# EAGLE board BMS Microcontroller rev1 (EAGLE 7.7.0)
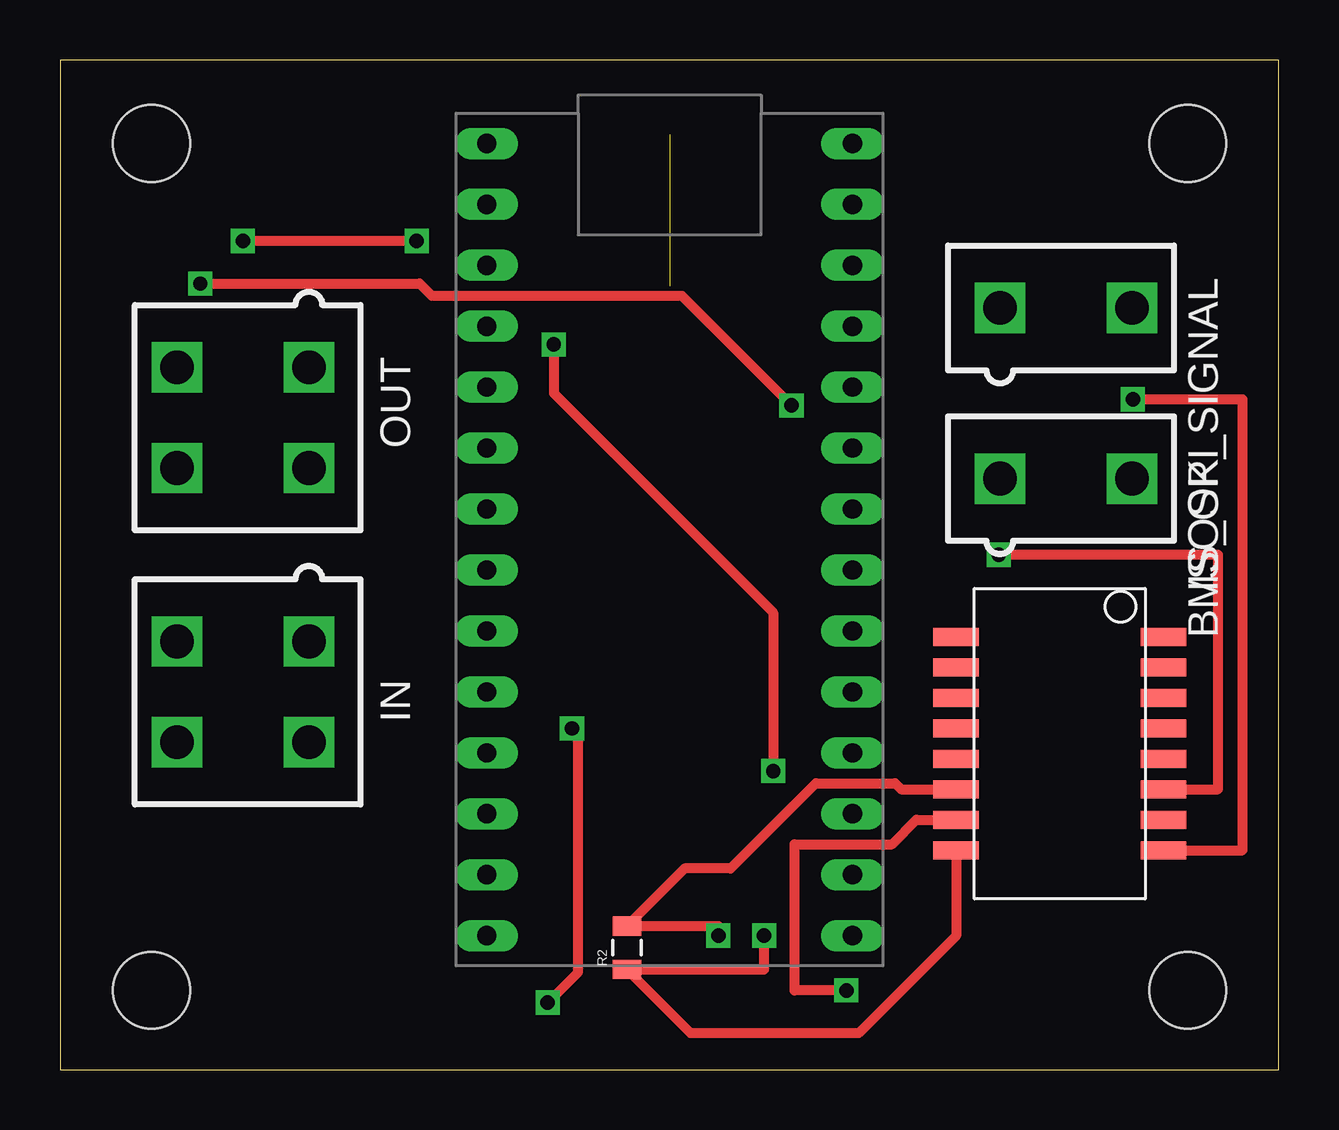
[diagram p0: board, top side]
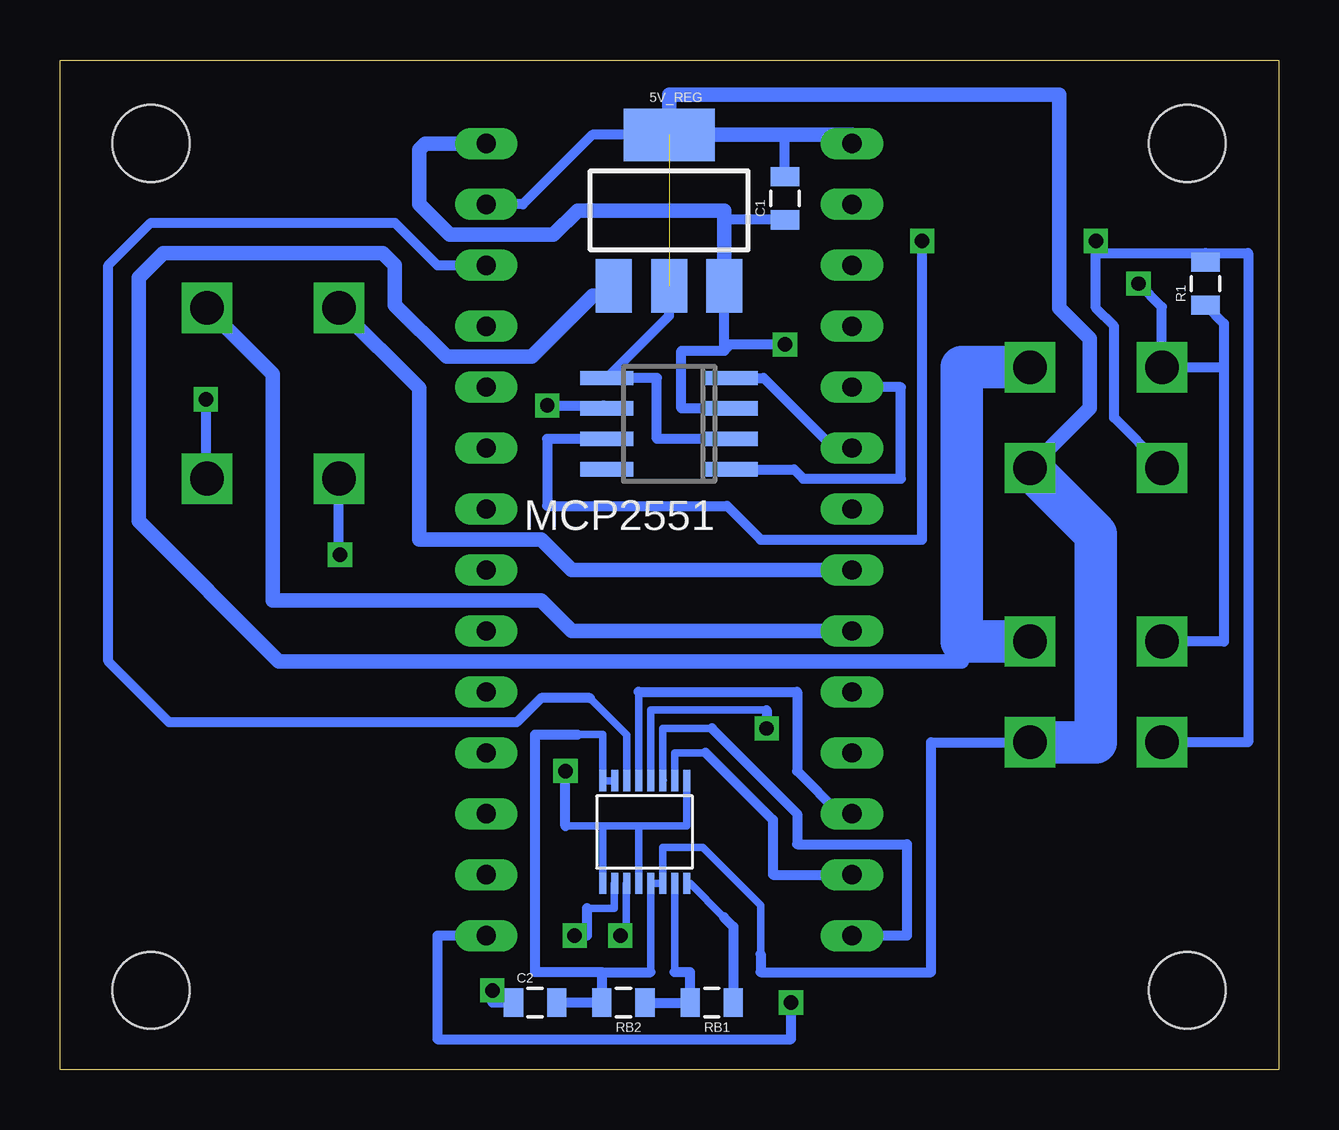
[diagram p1: board, bottom side, seen from below]

Size 50.78 x 42.09 mm. Coordinates in mm from the lower left corner, seen from the top.
Outline: 0,0 50.78,0 50.78,42.09 0,42.09 0,0
Copper layers (1*16): Top 0.035mm / dielectric 1.5mm / Bottom 0.035mm
Design rules "default": minimum track width 10mil, minimum drill 24mil, track to track 8mil, track to pad 8mil, pad to pad 8mil, via to via 8mil, smd to smd 8mil, copper to edge 40mil, drill to drill 8mil, minimum pad ring 10mil, minimum via ring 8mil, stop-mask expansion 4mil, vias tented up to drill 0mil, thermal gap 10mil
Holes 3.2 mm at 3.81,38.61 46.99,38.61 46.99,3.3 3.81,3.3

## Footprints (pad centres in the part's own frame; a part is rotated, then mirrored left to right if it is on the bottom)
SOT223 = smd 1.5 x 2.235: 1 -2.3,-3.15; 2 0,-3.15; 3 2.3,-3.15 | smd 3.8 x 2.2: 4 0,3.15
MINIFIT_5566-2 = drill 1.4 square: 1 0,-2.75; 2 0,2.75
0805 = smd 0.8 x 1.2: 1 -0.9,0; 2 0.9,0
MINIFIT_5566-4 = drill 1.4 square: 1 2.1,-2.75; 2 -2.1,-2.75; 3 2.1,2.75; 4 -2.1,2.75
SOIC-08 = smd 0.6 x 2.2: 1 -1.905,-2.6; 2 -0.635,-2.6; 3 0.635,-2.6; 4 1.905,-2.6; 5 1.905,2.6; 6 0.635,2.6; 7 -0.635,2.6; 8 -1.905,2.6
749010013 = smd 1.905 x 0.762: 1 4.318,4.445; 2 4.318,3.175; 3 4.318,1.905; 4 4.318,0.635; 5 4.318,-0.635; 6 4.318,-1.905; 7 4.318,-3.175; 8 4.318,-4.445; 9 -4.318,-4.445; 10 -4.318,-3.175; 11 -4.318,-1.905; 12 -4.318,-0.635; 13 -4.318,0.635; 14 -4.318,1.905; 15 -4.318,3.175; 16 -4.318,4.445
LTC6820 = smd 0.305 x 0.889: 1 -1.75,-2.14; 2 -1.25,-2.14; 3 -0.75,-2.14; 4 -0.25,-2.14; 5 0.25,-2.14; 6 0.75,-2.14; 7 1.25,-2.14; 8 1.75,-2.14; 9 1.75,2.14; 10 1.25,2.14; 11 0.75,2.14; 12 0.25,2.14; 13 -0.25,2.14; 14 -0.75,2.14; 15 -1.25,2.14; 16 -1.75,2.14
TEENSY_3.2_SIMPLE = drill 0.8 long: 3.3V 16.51,29.21; A0 16.51,3.81; A1 16.51,6.35; A2 16.51,8.89; A3 16.51,11.43; A4 16.51,13.97; A5 16.51,16.51; A6 16.51,19.05; A7 16.51,21.59; A8 16.51,24.13; A9 16.51,26.67; AGND 16.51,31.75; D0(RX1) 1.27,31.75; D1(TX1) 1.27,29.21; D2 1.27,26.67; D3(CANTX) 1.27,24.13; D4(CANRX) 1.27,21.59; D5 1.27,19.05; D6 1.27,16.51; D7(RX3) 1.27,13.97; D8(TX3) 1.27,11.43; D9(RX2) 1.27,8.89; D10(TX2) 1.27,6.35; D11 1.27,3.81; D12 1.27,1.27; D13 16.51,1.27; GND 1.27,34.29; VIN 16.51,34.29

## Placement (x,y rotation side)
5V_REG  [SOT223]  25.4,35.81 0 bottom
BMS_OK_SIGNAL  [MINIFIT_5566-2]  41.91,31.75 270 top
C1  0.1uF  [0805]  20.57,36.32 90 bottom
C2  100pF  [0805]  30.99,2.79 0 bottom
IN  MINIFIT_5566-4  [MINIFIT_5566-4]  7.62,15.75 90 top
ISOSPI  MINIFIT_5566-2  [MINIFIT_5566-2]  41.91,24.64 270 top
MCP2551  MCP2551  [SOIC-08]  25.4,26.92 90 bottom
OUT  MINIFIT_5566-4  [MINIFIT_5566-4]  7.62,27.18 90 top
R1  120Ω  [0805]  3.05,32.77 90 bottom
R2  120Ω  [0805]  23.62,5.08 90 top
RB1  [0805]  23.62,2.79 180 bottom
RB2  [0805]  27.3,2.79 180 bottom
TRANSFORMER-  [749010013]  41.66,13.59 0 top
U$1  LTC6820  [LTC6820]  26.42,9.91 180 bottom
U$3  TEENSY_3.2_SIMPLE  [TEENSY_3.2_SIMPLE]  16.51,4.32 0 top

## Library data of the parts
5V_REG C1 C2 MCP2551 R1 R2 RB1 RB2 TRANSFORMER- U$1 U$3 = HyTechDevices
BMS_OK_SIGNAL ISOSPI = HyTechDevices; OC_FARNELL: 1822072; OC_NEWARK: unknown
IN OUT = HyTechDevices; OC_FARNELL: unknown; OC_NEWARK: unknown

## Nets
5V_SUPPLY: 5V_REG.3 C1.1 MCP2551.3 U$1.1 U$1.9 U$1.12 U$3.VIN
12V_SUPPLY: 5V_REG.1 IN.1 OUT.1
CANH: IN.4 MCP2551.7 OUT.4 R1.2
CANL: IN.3 MCP2551.6 OUT.3 R1.1
CS: U$1.5 U$3.D10(TX2)
GND: 5V_REG.2 5V_REG.4 C1.2 C2.2 IN.2 MCP2551.2 MCP2551.5 OUT.2 RB2.2 U$1.7 U$1.8 U$1.13 U$1.14 U$3.AGND U$3.GND
ISOSPI-M: ISOSPI.2 TRANSFORMER-.8
ISOSPI-P: ISOSPI.1 TRANSFORMER-.6
MISO: U$1.3 U$3.D12
MOSI: U$1.2 U$3.D11
N$1: U$1.6 U$3.3.3V
N$2: U$1.4 U$3.D13
N$5: C2.1 TRANSFORMER-.10
N$6: RB1.1 U$1.16
N$7: RB1.2 RB2.1 U$1.15
N$8: R2.2 TRANSFORMER-.11 U$1.11
N$9: R2.1 TRANSFORMER-.9 U$1.10
N$10: BMS_OK_SIGNAL.1 U$3.D6
N$11: BMS_OK_SIGNAL.2 U$3.D7(RX3)
RX: MCP2551.4 U$3.D4(CANRX)
TX: MCP2551.1 U$3.D3(CANTX)

## Tracks (layer width: path | path; a pad name or v marks a point on that pad's centre or on a via)
5V_SUPPLY  (via drill 0.6)
  Top 0.406: v20.57,30.23 20.57,28.19 29.72,19.05 v29.72,12.45
  Bottom 0.305: 26.67,10.16 24.67,10.16 U$1.1 24.67,12.19 | 26.67,10.16 28.17,10.16 | 28.17,10.16 U$1.9 | 26.67,10.16 U$1.12 | 28.17,10.16 29.72,10.16
  Bottom 0.406: MCP2551.3 24.89,27.56 24.89,29.97 23.1,29.97 | 23.1,29.97 5V_REG.3 | C1.1 23.1,35.42 23.1,35.31 | v20.57,30.23 22.85,30.23 23.1,29.97 | 29.72,10.16 v29.72,12.45
  Bottom 0.61: 5V_REG.3 23.1,35.31 23.1,35.81 29.21,35.81 30.23,34.8 34.54,34.8 35.81,36.07 35.81,38.35 35.56,38.61 U$3.VIN
12V_SUPPLY
  Bottom 0.406: 5V_REG.1 28.11,32.26
  Bottom 0.61: 5V_REG.1 27.85,32.51 | 13.21,17.85 13.21,17.02 41.66,17.02 47.5,22.86 47.5,33.02 46.48,34.04 37.34,34.04 36.83,33.53 36.83,31.88 34.67,29.72 31.11,29.72 28.57,32.26 28.11,32.26
  Bottom 1.778: OUT.1 13.21,29.28 13.21,17.85 IN.1
CANH  (via drill 0.6)
  Top 0.406: v14.86,34.54 v7.62,34.54
  Bottom 0.406: 7.62,34.04 3.05,34.04 | 3.05,34.04 1.27,34.04 1.27,13.65 IN.4 | R1.2 3.05,34.04 | OUT.4 4.87,25.19 6.86,27.18 6.86,30.99 7.62,31.75 7.62,34.04 | MCP2551.7 30.48,26.29 30.48,23.5 22.99,23.5 21.59,22.1 14.86,22.1 v14.86,34.54 | v7.62,34.54 7.62,34.04
CANL  (via drill 0.6)
  Top 0.406: v5.84,32.77 14.99,32.77 15.49,32.26 25.91,32.26 v30.48,27.69
  Bottom 0.406: 2.29,29.28 OUT.3 4.87,31.79 v5.84,32.77 | 2.29,29.28 2.29,17.85 IN.3 | R1.1 2.29,31.1 2.29,29.28 | v30.48,27.69 28.13,27.69 MCP2551.6
CS
  Bottom 0.305: U$1.5 26.67,15.75
  Bottom 0.406: 26.67,15.75 20.07,15.75 20.07,12.45 18.29,10.67 U$3.D10(TX2)
GND  (1 unrouted)
  Bottom 0.305: U$1.7 U$1.8 28.17,13.97 29.21,13.97 | 26.17,4.06 U$1.13 U$1.14 25.67,9.27 24,9.27 21.59,6.86 21.59,4.83
  Bottom 0.406: 5V_REG.2 25.4,31.43 MCP2551.5 25.91,28.83 25.91,26.29 MCP2551.2 | 5V_REG.4 28.6,38.96 31.5,36.07 U$3.AGND | 10.37,14.48 IN.2 14.48,13.65 14.48,4.06 21.59,4.06 21.59,4.83 | C1.2 20.57,38.96 | C2.2 RB2.2 28.19,4.06 | 28.19,4.06 26.17,4.06 | 28.19,4.06 30.99,4.06 30.99,13.97 29.21,13.97
  Bottom 0.61: U$3.GND 17.78,38.96 20.57,38.96 5V_REG.4 25.4,40.64 9.14,40.64 9.14,31.75 7.87,30.48 7.87,27.57 OUT.2 10.37,25.19
  Bottom 1.778: IN.2 7.62,13.65 7.62,22.33 OUT.2
ISOSPI-M  (via drill 0.6)
  Top 0.406: TRANSFORMER-.8 49.28,9.14 49.28,27.94 v44.7,27.94
  Bottom 0.406: v44.7,27.94 44.7,24.64 ISOSPI.2
ISOSPI-P  (via drill 0.6)
  Top 0.406: TRANSFORMER-.6 48.26,11.68 48.26,21.46 v39.12,21.46
  Bottom 0.406: v39.12,21.46 39.16,21.51 ISOSPI.1
MISO
  Bottom 0.305: 25.65,12.06 U$1.3 25.67,14.22 23.62,14.22
  Bottom 0.406: 23.62,14.22 20.07,10.67 20.07,9.4 15.49,9.4 15.49,5.59 U$3.D12
MOSI
  Bottom 0.305: U$1.2 25.17,13.21 23.88,13.21
  Bottom 0.406: U$3.D11 21.08,8.13 21.08,10.41 23.88,13.21
N$1
  Bottom 0.305: U$1.6 27.17,13.96 28.7,15.49
  Bottom 0.406: 28.7,15.49 30.73,15.49 31.75,14.48 46.23,14.48 48.77,17.02 48.77,33.53 46.99,35.31 36.83,35.31 35.05,33.53 U$3.3.3V
N$2  (via drill 0.6)
  Top 0.406: v20.32,2.79 21.59,4.06 21.59,13.97 v21.34,14.22
  Bottom 0.305: U$1.4 26.16,14.99 21.34,14.99
  Bottom 0.406: 21.34,14.99 v21.34,14.22 | U$3.D13 35.05,5.59 35.05,1.27 20.32,1.27 v20.32,2.79
N$5  (via drill 0.6)
  Top 0.406: TRANSFORMER-.10 35.69,10.41 34.67,9.4 30.61,9.4 30.61,3.3 v32.77,3.3
  Bottom 0.406: C2.1 32.77,2.79 v32.77,3.3
N$6
  Bottom 0.305: U$1.16 24.53,7.77 23.11,6.35
  Bottom 0.406: 23.11,6.35 22.72,5.96 RB1.1
N$7
  Bottom 0.305: 25.17,4.06 U$1.15
  Bottom 0.406: RB2.1 RB1.2 24.52,4.06 25.17,4.06
N$8  (via drill 0.6)
  Top 0.406: TRANSFORMER-.11 35.05,11.68 34.8,11.94 31.5,11.94 27.94,8.38 26.02,8.38 R2.2 27.43,5.98 v27.43,5.59
  Bottom 0.305: U$1.11 27.18,5.59
  Bottom 0.406: 27.18,5.59 v27.43,5.59
N$9  (via drill 0.6)
  Top 0.406: TRANSFORMER-.9 37.34,5.59 33.27,1.52 26.28,1.52 R2.1 29.34,4.18 v29.34,5.59
  Bottom 0.305: U$1.10 27.69,7.77 27.69,6.73 28.83,6.73
  Bottom 0.406: 28.83,6.73 28.83,5.59 v29.34,5.59
N$10
  Bottom 0.61: BMS_OK_SIGNAL.1 35.81,28.4 35.81,22.1 30.73,22.1 29.46,20.83 U$3.D6
N$11
  Bottom 0.61: BMS_OK_SIGNAL.2 41.91,29 41.91,19.56 30.73,19.56 29.46,18.29 U$3.D7(RX3)
RX
  Bottom 0.406: MCP2551.4 21.46,28.83 18.54,25.91 U$3.D4(CANRX)
TX
  Bottom 0.406: MCP2551.1 20.19,25.02 19.81,24.64 15.75,24.64 15.75,28.45 U$3.D3(CANTX)